# Altium PCB usb_smt.PCBDOC
Units mil, origin at the board's own origin, x right, y up, seen from the top; angles counter-clockwise.
Board outline 1245 x 1000 mil, 2 copper layers (Top Layer, Bottom Layer); 10 components, 20 nets, 54 pads, 0 vias.
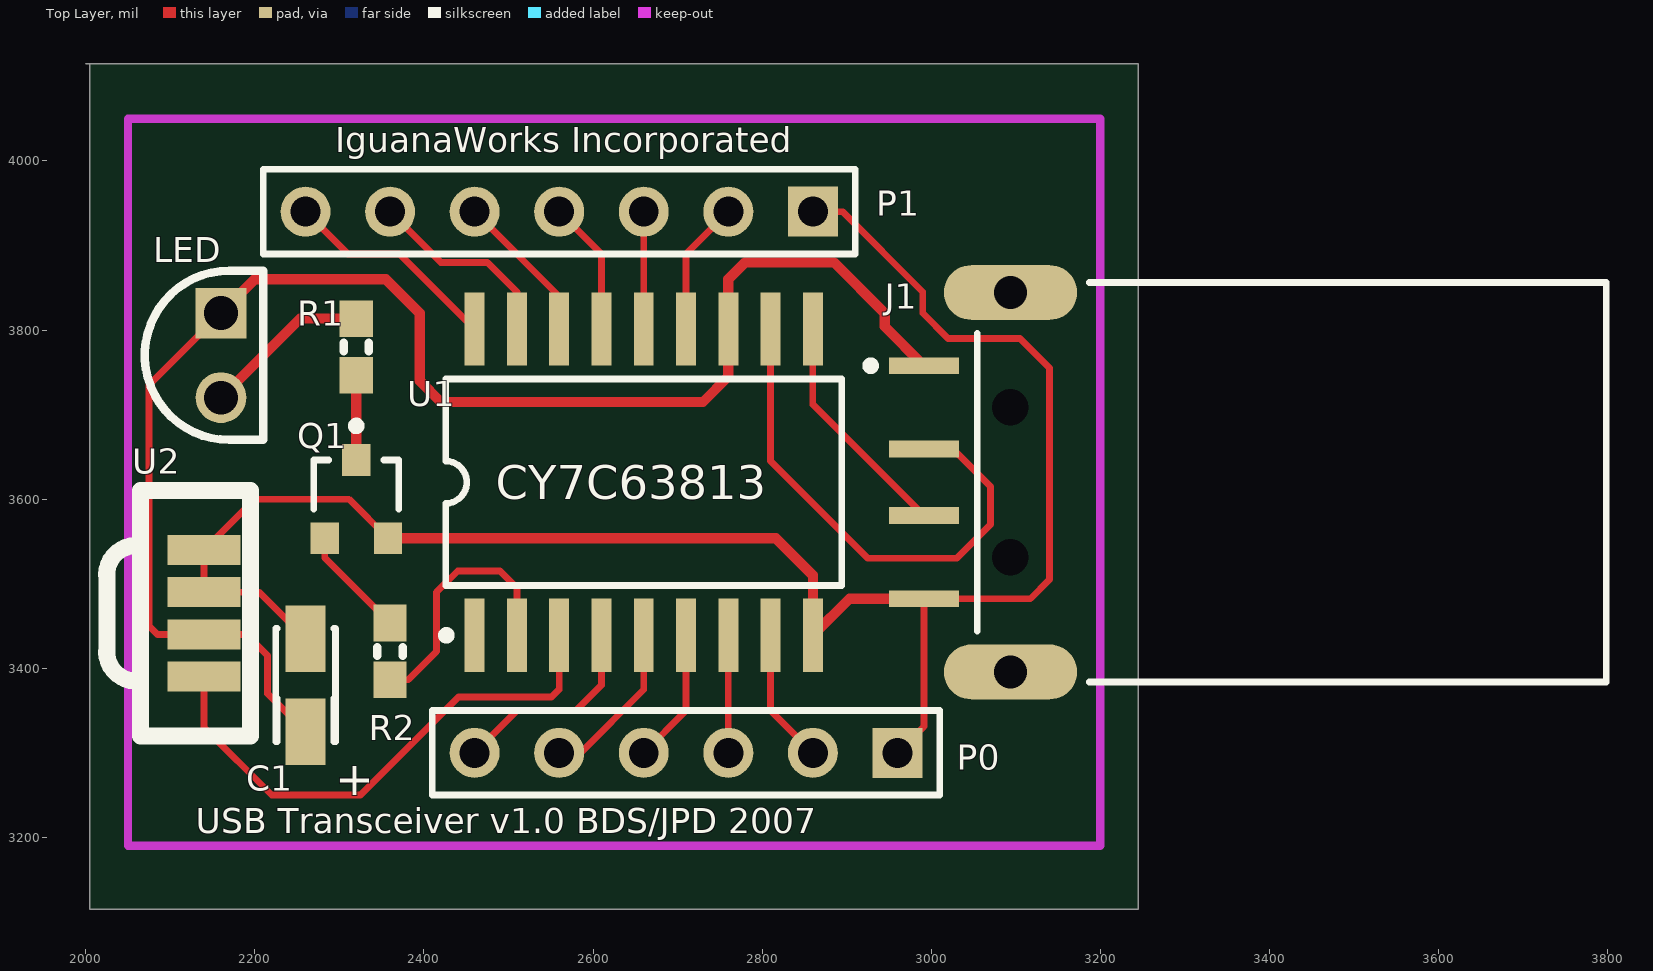
[diagram p0: Top Layer view]
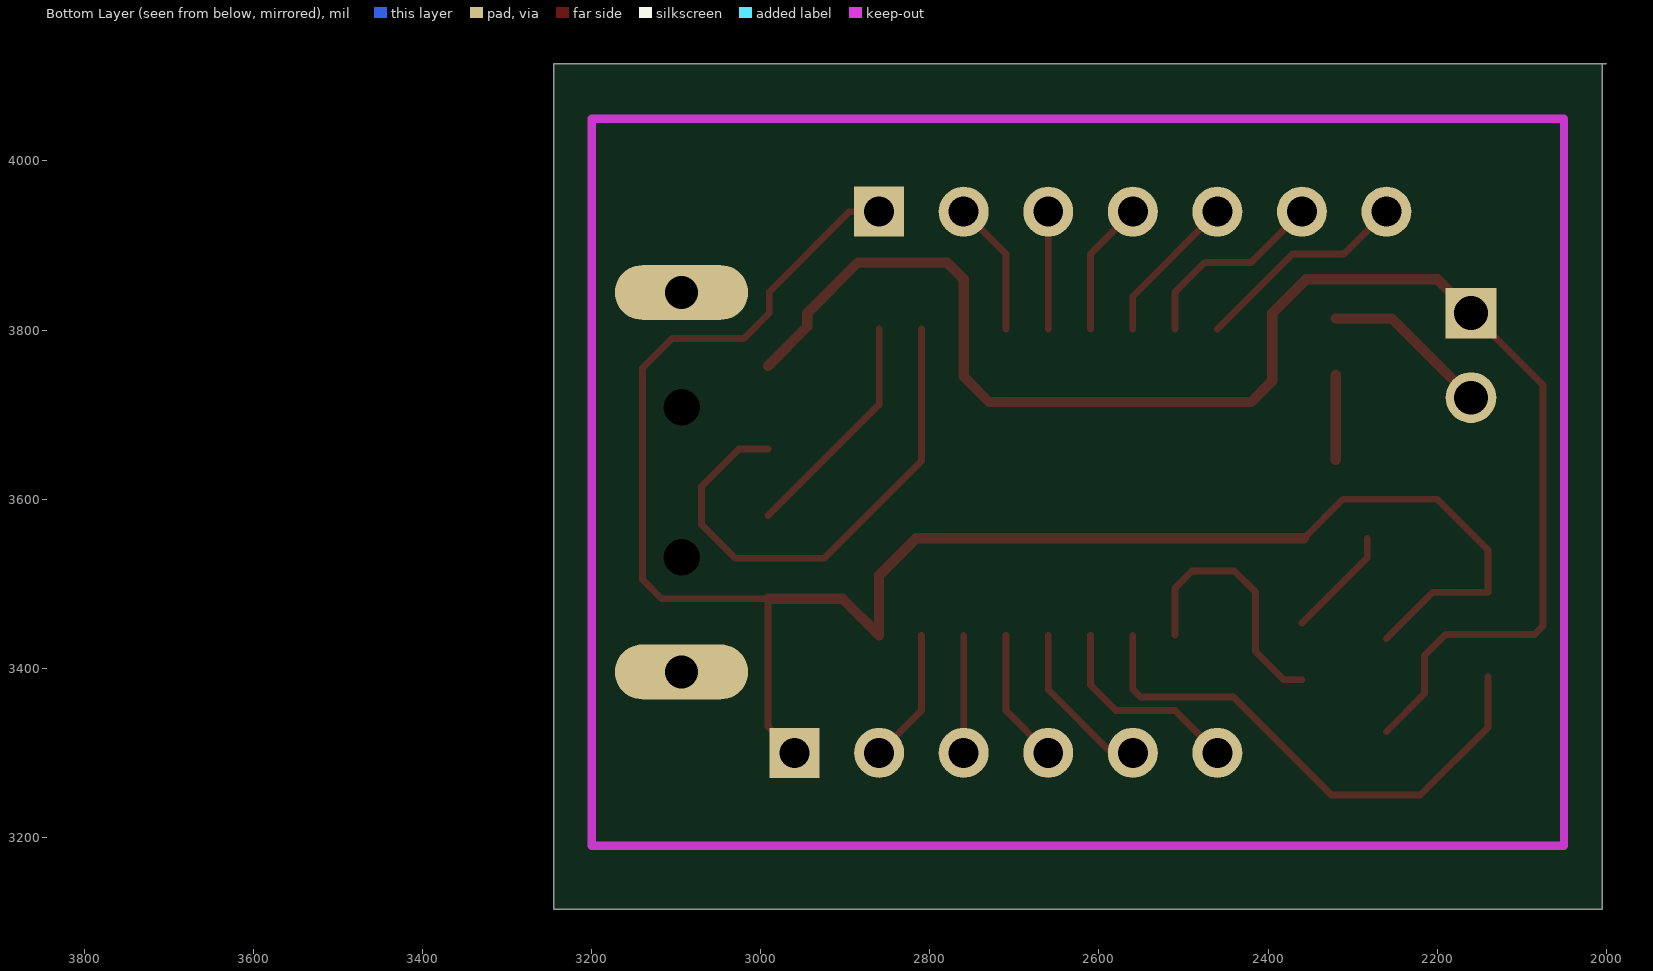
[diagram p1: Bottom Layer view, seen from below]

## Layer stack, top to bottom
Top Layer: signal copper 1.4
Dielectric: dielectric 12.6, FR-4, Dk 4.8
Bottom Layer: signal copper 1.4

## Board outline
2000,4115 3245,4115 3245,3115 2005,3115 2005,4115

## Design rules (kind name [scope] priority, off if disabled: settings)
Clearance [All] p1: gap=8
ComponentClearance [All] p1: gap=10 collisioncheckmode=2 verticalgap=10
PolygonConnect [All] p1: connectstyle=Relief reliefconductorwidth=10 reliefentries=4 polygonreliefangle="90 Angle"
RoomDefinition usb_smt [InComponentClass('usb_smt')] p1 off: confinementstyle=ConfineIn formatcopy=TRUE lockcomponents=FALSE outline 0,0 2000,0 2000,1000 0,1000
RoutingVias [All] p1: holewidth=25 width=40 viastyle="Through Hole" minholewidth=28 minwidth=50 maxholewidth=28 maxwidth=50
SolderMaskExpansion [All] p1: expansion=4
TestPointUsage [All] p1: valid=0 allowmultiple=FALSE
Testpoint [All] p1: side=15 testpointundercomponent=TRUE minsize=40 maxsize=100 preferedsize=60 minholesize=0 maxholesize=40 preferedholesize=32 testpointgrid=1 style=1023 order=0123456789
Width [All] p1: maxlimit=12 minlimit=8 preferedwidth=8 bottomlayer_maxwidth=8 minimp=50.000000 maximp=50.000000 favimp=50.000000
17 further rules are at their usual default settings.

## Components (designator, comment, footprint, x,y, rotation, side; value= is the part's Value field where it differs from the comment)
C1 "Cap Pol1" TC3216-1206 2260,3380 r90 top
J1 "1-1470168-1" 1470695 3200,3620 r0 top
LED "TSAL 6400 IRED" LED 2160,3820 r270 top
P0 "Header 6" HDR1X6 2960,3300 r180 top
P1 "Header 7" HDR1X7 2860,3940 r180 top
Q1 "NPN" SO-G3/D4.1 2320,3600 r0 top
R1 "50ohm" CR1608-0603 2320,3780 r90 top
R2 "Res2" CR1608-0603 2360,3420 r90 top
U1 "CY7C63813-SXC" SO-G18/E6.2 2660,3620 r0 top
U2 "TSOP362XX" "TSOP 362XX" 2140,3540 r270 top

## Footprints (in the part's own frame and the unit in brackets; to place one, negate y for a bottom-side part, rotate by r counter-clockwise, add the part's x,y. Pads: shape width x height; smd on the part's side, far side on the other; paste and mask are expansions set on the pad)
1470695 [mm] "Connector; USB1.1, Type A, SM; 4 Position; Right Angle"
  rect 2.1x0.5 smd: 1(-5.3,3.5) 2(-5.3,1) 3(-5.3,-1) 4(-5.3,-3.5)
  oval 4x1.65 hole 1: 5(-2.7,-5.7) 6(-2.7,5.7)
  round 0.8 hole 1.1 unplated: MH1(-2.7,-2.25) MH2(-2.7,2.25)
  silkscreen extent -7.02,-6 15.2,6
CR1608-0603 [mm] "Chip Resistor; Body 1.6 x 0.8 mm (LxW typ)"
  rect 1.1x1 smd: 1(-0.85,0) 2(0.85,0)
HDR1X6 [mm] "Connector; Header; 6 Position"
  rect 1.5x1.5 hole 0.9: 1(0,0)
  round 1.5 hole 0.9: 2(2.54,0) 3(5.08,0) 4(7.62,0) 5(10.16,0) 6(12.7,0)
  silkscreen extent -1.27,-1.27 13.97,1.27
HDR1X7 [mm] "Connector; Header; 7 Position"
  rect 1.5x1.5 hole 0.9: 1(0,0)
  round 1.5 hole 0.9: 2(2.54,0) 3(5.08,0) 4(7.62,0) 5(10.16,0) 6(12.7,0) 7(15.24,0)
  silkscreen extent -1.27,-1.27 16.51,1.27
LED [mil] "2-pin LED footprint"
  rect 60x60 hole 40: 1(0,0)
  round 60 hole 40: 2(100,0)
  silkscreen extent -50,-90 150,50
SO-G3/D4.1 [mm] "SOT-23; 3 Leads; Body 3.0 x 2.5 mm, inc. leads (LxW max), Alternate Lead Configuration"
  rect 0.85x0.95 smd: 1(0,1.175) 2(-0.95,-1.175) 3(0.95,-1.175)
  silkscreen extent -1.27,-0.3 1.28,2.32
SO-G18/E6.2 [mm] "Small Outline; 18 Leads; Body Width 7.5 mm; Pitch 1.27 mm"
  rect 0.6x2.2 smd: 1(-5.08,-4.6) 2(-3.81,-4.6) 3(-2.54,-4.6) 4(-1.27,-4.6) 5(0,-4.6) 6(1.27,-4.6) 7(2.54,-4.6) 8(3.81,-4.6) 9(5.08,-4.6) 10(5.08,4.6) 11(3.81,4.6) 12(2.54,4.6) 13(1.27,4.6) 14(0,4.6) 15(-1.27,4.6) 16(-2.54,4.6) 17(-3.81,4.6) 18(-5.08,4.6)
  silkscreen extent -6.05,-4.72 5.95,3.1
TC3216-1206 [mm] "Capacitor, SM Tantalum; Body 3.2 x 1.6 mm (LxW typ)"
  rect 2x1.2 smd: 1(-1.4,0) 2(1.4,0)
  silkscreen extent -1.7,-0.9 1.7,0.9
"TSOP 362XX" [mm] "SMT IR receiver module"
  rect 0.9x2.2 smd: 1(0,0) 2(1.27,0) 3(2.54,0) 4(3.81,0)
  silkscreen extent -1.78,-2.93 5.59,1.4

## Part data
C1: "Polarized Capacitor (Radial)"
J1: "USB 1.1, Right Angle, Thru-Hole, A Type, Receptacle, 4x4 Position, Stacked, Black"
LED: library part LED0, "Typical INFRARED GaAs LED"
P0 P1: library part "Header 5", "Header, 5-Pin"
Q1: "NPN Bipolar Transistor"
R1: library part "Res Semi", "Semiconductor Resistor"
R2: "Resistor"
U1: "USB microcontroller, SMT"
U2: library part TSOP36238

## Nets (pads, with @x,y where several pads share a name; then routed paths per layer and width w, separated by ;. In a path a pad name is that pad's centre, name@x,y a point inside that pad or via, vN(x,y) a via of type N, cw(c..) or ccw(c..) an arc to the next point about the centre after c; other vN are vias at no path point)
GND: C1.2 J1.4 P0.1 P1.1 Q1.3 U1.9 U2.1 U2.2 | length 2169.8
  Top Layer w8: C1.2 2205.12,3490 U2.2 U2.1 2200,3600 2311.14,3600 Q1.3 ; P1.1 2895,3940 2990,3845 2990,3820 3020,3790 3105,3790 3140,3755 3140,3505 3117.2,3482.2 J1.4 2991.34,3331.34 P0.1
  Top Layer w12: Q1.3 2816.26,3553.74 2860,3510 U1.9 2903.31,3482.2 J1.4
NetJ1_2: J1.2 U1.11 | length 622.3
  Top Layer w8: U1.11 2810,3645 2925,3530 3030,3530 3070,3570 3070,3615 3025.63,3659.37 J1.2
NetJ1_3: J1.3 U1.10 | length 274.9
  Top Layer w8: U1.10 2860,3711.97 J1.3
NetLED_2: LED.2 R1.2 | length 198.7
  Top Layer w12: LED.2 2253.46,3813.46 R1.2
NetP0_2: P0.2 U1.8 | length 159.6
  Top Layer w8: U1.8 2810,3350 P0.2
NetP0_3: P0.3 U1.7 | length 138.9
  Top Layer w8: P0.3 U1.7
NetP0_4: P0.4 U1.6 | length 159.6
  Top Layer w8: P0.4 2710,3350 U1.6
NetP0_5: P0.5 U1.5 | length 195
  Top Layer w8: P0.5 2585,3300 2660,3375 U1.5
NetP0_6: P0.6 U1.4 | length 242
  Top Layer w8: P0.6 2510,3350 2580,3350 2610,3380 U1.4
NetP1_2: P1.2 U1.13 | length 159.6
  Top Layer w8: U1.13 2710,3890 P1.2
NetP1_3: P1.3 U1.14 | length 138.9
  Top Layer w8: U1.14 P1.3
NetP1_4: P1.4 U1.15 | length 159.6
  Top Layer w8: P1.4 2610,3890 U1.15
NetP1_5: P1.5 U1.16 | length 180.3
  Top Layer w8: P1.5 2560,3840 U1.16
NetP1_6: P1.6 U1.17 | length 233.2
  Top Layer w8: P1.6 2420,3880 2475,3880 2510,3845 U1.17
NetP1_7: P1.7 U1.18 | length 257.5
  Top Layer w8: P1.7 2310,3890 2371.1,3890 U1.18
NetQ1_1: Q1.1 R1.1 | length 100.3
  Top Layer w12: Q1.1 R1.1
NetQ1_2: Q1.2 R2.2 | length 132.3
  Top Layer w8: Q1.2 2282.6,3530.87 R2.2
NetR2_1: R2.1 U1.2 | length 308.6
  Top Layer w8: R2.1 2381.54,3386.54 2415,3420 2415,3490 2440,3515 2490,3515 2510,3495 U1.2
NetU1_3: U1.3 U2.4 | length 628.8
  Top Layer w8: U2.4 2140,3330 2220,3250 2325,3250 2441,3366 2551,3366 2560,3375 U1.3
VCC: C1.1 J1.1 LED.1 U1.12 U2.3 | length 1818.9
  Top Layer w8: LED.1 2075,3735 2075,3450 2085,3440 2190,3440 2215,3415 2215,3369.88 C1.1
  Top Layer w12: LED.1 2200,3860 2355,3860 2395,3820 2395,3740 2420,3715 2730,3715 2760,3745 2760,3860 2780,3880 2885,3880 2945,3820 2945,3804.13 J1.1
pads on no net: J1.5 J1.6 J1.MH1 J1.MH2 U1.1

## Keep-outs
Keep-Out Layer:
  lines w10: 2050,3190 2050,4050 3200,4050 3200,3190 2050,3190

## Silkscreen, mask and mechanical layers (free items; w line width, h text height)
Top Overlay:
  lines w10: 2305,3775 2305,3785 ; 2335,3775 2335,3785 ; 2345,3415 2345,3425 ; 2375,3415 2375,3425
  text "IguanaWorks Incorporated" at 2295,4010 h30
  text "CY7C63813" at 2485,3600 h40
  text "+" at 2295,3250 h40
  text "USB Transceiver v1.0 BDS/JPD 2007" at 2130,3205 h30